# Altium PCB pmu.PcbDoc
Units mil, origin at the board's own origin, x right, y up, seen from the top; angles counter-clockwise.
Board outline 1870 x 900 mil, 2 copper layers (Top Layer, Bottom Layer); 22 components, 13 nets, 54 pads, 17 vias.
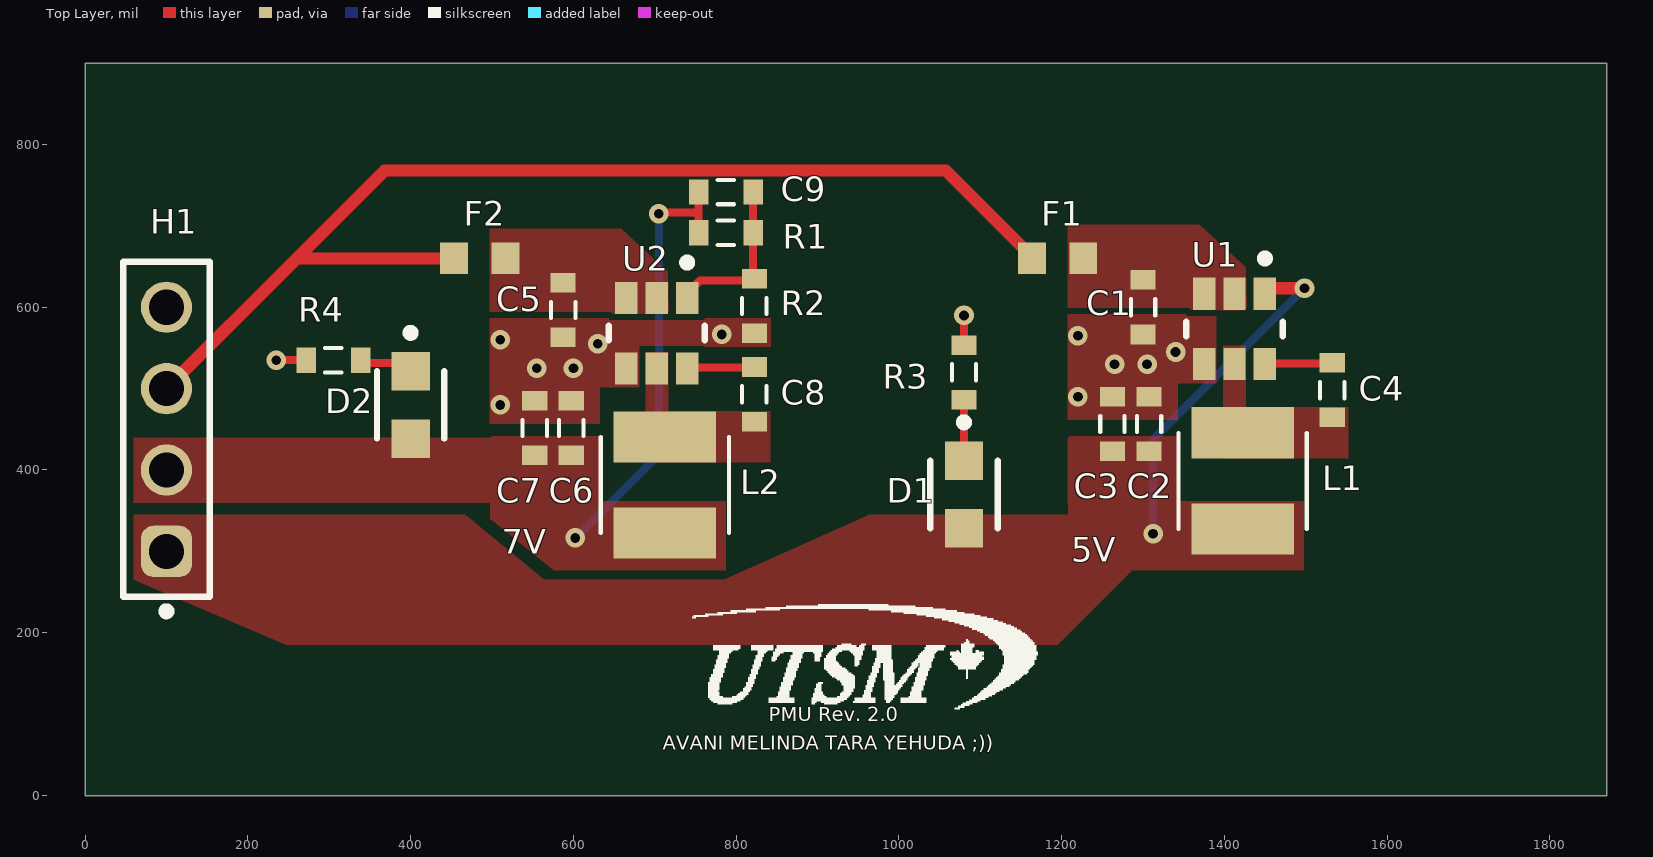
[diagram p0: Top Layer view]
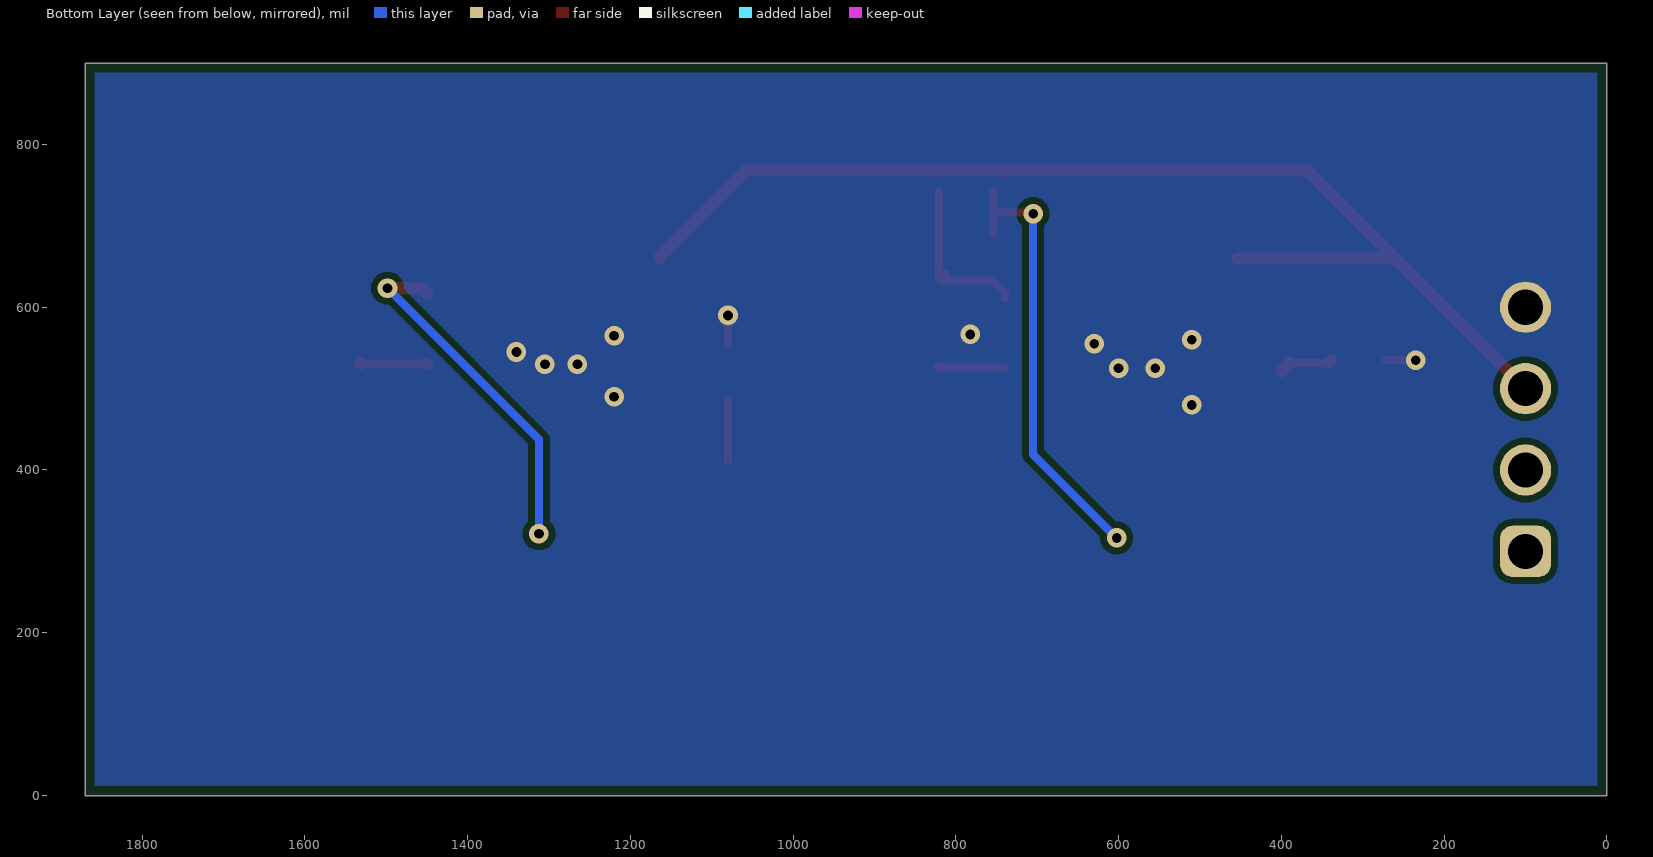
[diagram p1: Bottom Layer view, seen from below]
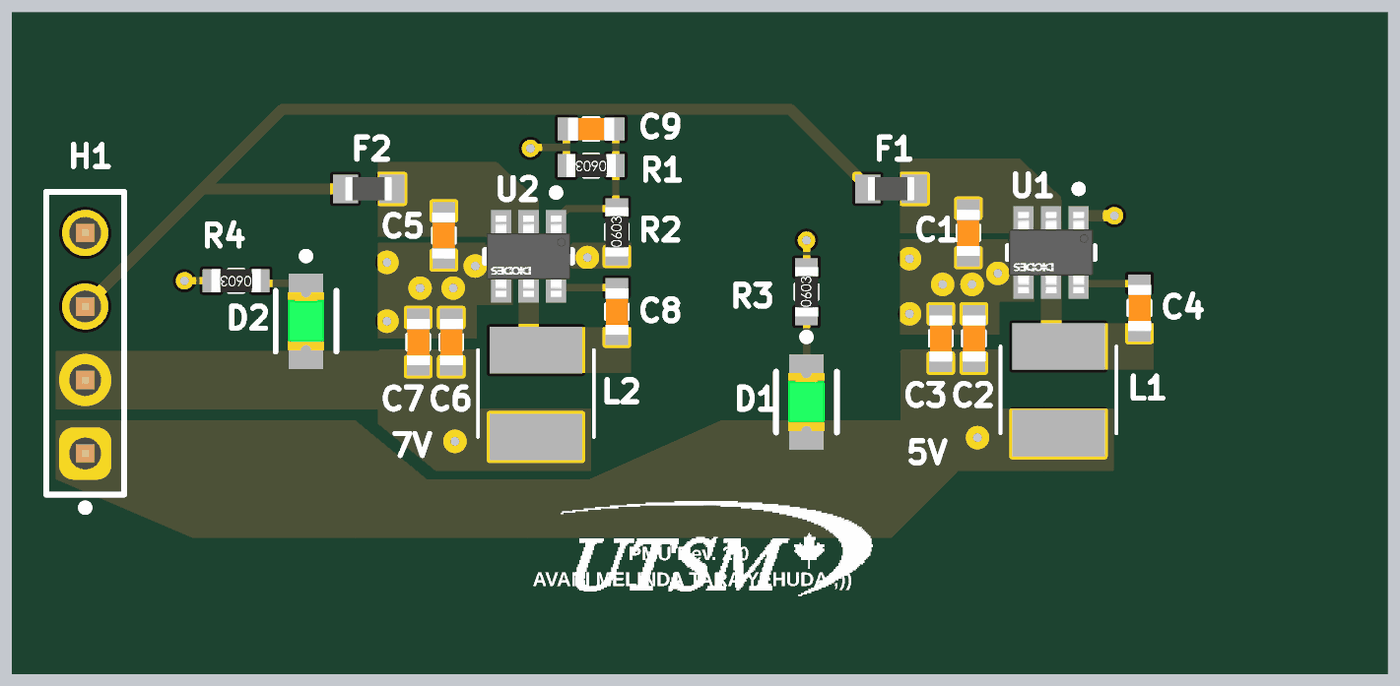
[diagram p2: 3D render of the assembled board from above, using the file's embedded part models]

## Layer stack, top to bottom
Top Solder: solder mask 0.4, Solder Resist, Dk 3.5
Top Layer: signal copper 1.4
Dielectric 1: dielectric 12.6, FR-4, Dk 4.8
Bottom Layer: signal copper 1.4
Bottom Solder: solder mask 0.4, Solder Resist, Dk 3.5

## Board outline
0,0 1870,0 1870,900 0,900

## Design rules (kind name [scope] priority, off if disabled: settings)
BoardOutlineClearance [All] p1: gap=11.81 ignorepadtopadclearanceinfootprint=FALSE except(15.75: Arc-SplitBarrior Arc-SplitContinuation Track-SplitBarrior Track-SplitContinuation SMDPad-SplitBarrior SMDPad-SplitContinuation THPad-SplitBarrior THPad-SplitContinuation Via-SplitBarrior Via-SplitContinuation Fill-SplitBarrior Fill-SplitContinuation Poly-SplitBarrior Poly-SplitContinuation Region-SplitBarrior Region-SplitContinuation Text-SplitBarrior Text-SplitContinuation)
Clearance "Clearance Different Nets" [All] p1: gap=7.87 ignorepadtopadclearanceinfootprint=FALSE except(3.5: Arc-Arc Arc-Track Arc-SMDPad Track-Track Track-SMDPad; 5: SMDPad-SMDPad SMDPad-Via THPad-Via Via-Via; 10: Arc-Via Arc-Text Track-Via Track-Text SMDPad-Text THPad-Text Via-Text Fill-Text Poly-Text Region-Text Text-Text; 19.68: THPad-THPad Via-Hole)
Clearance "Clearance Same Nets" [All] p2: gap=7.87 ignorepadtopadclearanceinfootprint=FALSE except(3.5: Arc-Arc Arc-Track Arc-SMDPad Track-Track Track-SMDPad SMDPad-SMDPad; 5: SMDPad-Via THPad-Via; 10: Arc-Via Arc-Text Track-Via Track-Text SMDPad-Text THPad-Text Via-Via Via-Text Fill-Text Poly-Text Region-Text Text-Text)
Clearance "Clearance Bottom Layer" [OnLayer('Bottom Layer')] p3: gap=8 ignorepadtopadclearanceinfootprint=TRUE except(10: Arc-Text Track-Text SMDPad-Text THPad-Text Via-Text Fill-Text Poly-Text Region-Text Text-Text)
Clearance "Clearance Top Layer" [OnLayer('Top Layer')] p4: gap=8 ignorepadtopadclearanceinfootprint=TRUE except(10: Arc-Text Track-Text SMDPad-Text THPad-Text Via-Text Fill-Text Poly-Text Region-Text Text-Text)
HoleSize [All] p1: absolutevalues=TRUE maxlimit=248.03 minlimit=7.87 maxpercent=80.000 minpercent=20.000
MinimumAnnularRing [All] p1: minimumring=5.12
MinimumSolderMaskSliver [All] p1: minsoldermaskwidth=3.94
PolygonConnect PolygonConnect_1 [All] p1: connectstyle=Direct reliefconductorwidth=20 reliefentries=4 polygonreliefangle="90 Angle" airgapwidth=10
RoutingCorners [All] p1: cornerstyle=Round minsetback=100 maxsetback=100
RoutingVias [All] p1: holewidth=19.68 width=39.37 viastyle="Through Hole" minholewidth=7.87 minwidth=13.78 maxholewidth=39.37 maxwidth=78.74
SilkToSilkClearance [All] p1: silktosilkclearance=3.94
SilkToSolderMaskClearance [IsPad] p1: minsilkscreentomaskgap=3.94 clearancetoexposedcopper=TRUE
SolderMaskExpansion [All] p1: expansion=4 istentingtop=FALSE
SupplyNets "Schematic Supply Nets_3" [InNet('+5')] p1: voltage=0.000
SupplyNets "Schematic Supply Nets_2" [InNet('Vin')] p2: voltage=0.000
SupplyNets "Schematic Supply Nets_1" [InNet('+7')] p3: voltage=0.000
SupplyNets "Schematic Supply Nets" [InNet('GND')] p4: voltage=0.000
Width [All] p1: maxlimit=100 minlimit=3.5 preferedwidth=15
25 further rules are at their usual default settings.

## Components (designator, comment, footprint, x,y, rotation, side; value= is the part's Value field where it differs from the comment)
C1 "Cap" 0603c 1300,600 r90 top value=10uF
C2 "Cap" 0603c 1307.4,456.57 r270 top value=22uF
C3 "Cap" 0603c 1262.4,456.57 r270 top value=22uF
C4 "Cap" 0603c 1532.4,498.07 r270 top value=100nF
C5 "Cap" 0603c 587.4,596.57 r90 top value=10uF
C6 "Cap" 0603c 597.4,451.57 r270 top value=22uF
C7 "Cap" 0603c 552.4,451.57 r270 top value=22uF
C8 "Cap" 0603c 822.4,493.07 r270 top value=100nF
C9 "Cap" 0603c 787.4,741.57 r180 top value=100pF
D1 "LTST-C171GKT" FP-LTST-C171GKT-MFG 1080,370 r270 top
D2 "LTST-C171GKT" FP-LTST-C171GKT-MFG 400,480 r270 top
F1 "FMC16751WBTP" FUSC1608X64N 1195,660 r0 top
F2 "FMC16751WBTP" FUSC1608X64N 485,660 r0 top
H1 "61300411121" 61300411121 100,450 r90 top
L1 "3.3uH" 1210 1422.4,386.57 r270 top
L2 "3.3uH" 1210 712.4,381.57 r270 top
R1 "Res3" 0603r 787.4,691.57 r180 top value=200k
R2 "Res3" 0603r 822.4,601.57 r90 top value=25k
R3 "" 0603r 1080,520 r90 top value=300
R4 "" 0603r 305,535 r180 top value=300
U1 "AP63205WU-7" FP-TSOT26-MFG 1412.4,573.29 r270 top
U2 "AP63200WU-7" FP-TSOT26-MFG 702.4,568.29 r270 top

## Footprints (in the part's own frame and the unit in brackets; to place one, negate y for a bottom-side part, rotate by r counter-clockwise, add the part's x,y. Pads: shape width x height; smd on the part's side, far side on the other; paste and mask are expansions set on the pad)
0603c [mil]
  rect 24x31 smd: 1(-33.5,0) 2(33.5,0)
  silkscreen extent -10,-15 10,15, body extent -31,-15 31,16, height 31
0603r [mil]
  rect 24x31 smd: 1(-33.5,0) 2(33.5,0)
  silkscreen extent -10,-15 10,15, body extent -33,-16 33,16, height 22
1210 [mm]
  rect 1.6x3.2 smd: P$1(-1.5,0) P$2(1.5,0)
  silkscreen extent -1.5,-2 1.5,2
61300411121 [mm] "Pin Header, pitch 2.54 mm, THT, Vertical, single row, 4p"
  rrect50% 1.6x1.6 hole 1.1: 1(-3.81,0)
  round 1.6 hole 1.1: 2(-1.27,0) 3(1.27,0) 4(3.81,0)
  silkscreen extent -5.8,-1.35 5.23,1.35, body extent -5.08,-1.27 5.08,1.27, height 8.57
FP-LTST-C171GKT-MFG [mm]
  rect 1.2x1.2 smd paste+0 mask+0: 1(-1.05,0) 2(1.05,0)
  silkscreen extent -2.37,-1.05 1.05,1.05, body extent -1.75,-0.77 1.75,0.77, height 0.25
FP-TSOT26-MFG [mm]
  rect 1x0.7 smd paste+0 mask+0: 1(-1.099,0.95) 2(-1.099,0) 3(-1.099,-0.95) 4(1.099,-0.95) 5(1.099,0) 6(1.099,0.95)
  silkscreen extent -2.32,-1.5 0.22,1.5, body extent -1.7,-1.6 1.7,1.6, height 0.25
FUSC1608X64N [mm]
  rect 0.87x0.98 smd: 1(-0.8,0) 2(0.8,0)
  body extent -0.8,-0.4 0.8,0.4, height 0.64

## Part data
C1 C5: "SMD Capacitor / CL21A106KOQNNNG", LatestRevisionDate=17-Jul-2002, LatestRevisionNote="Re-released for DXP Platform.", PackageDescription="Radial Cap, Thru-Hole; 2 Leads; 0.3 in Pin Spacing", PackageReference=RAD-0.3, Published=8-Jun-2000, Publisher="Altium Limited"
C2 C3 C4 C6 C7 C8 C9: "SMD Capacitor", LatestRevisionDate=17-Jul-2002, LatestRevisionNote="Re-released for DXP Platform.", PackageDescription="Radial Cap, Thru-Hole; 2 Leads; 0.3 in Pin Spacing", PackageReference=RAD-0.3, Published=8-Jun-2000, Publisher="Altium Limited"
D1 D2: library part CMP-22017-000007-1, "LED GREEN CLEAR CHIP SMD", Case Code (Imperial)=0805, Case Code (Metric)=2012, Color=Green, Forward Current=30mA, Forward Voltage=2.1V, Lens Color=Colorless, Max Operating Temperature=85°C, Min Operating Temperature=-55°C, Package Quantity=1, Power Dissipation=100mW, Reverse Voltage=5V, Test Current=10mA, Case/Package=0805, Depth=1.25mm, Dominant Wavelength=569nm, Height=0.8mm, Illumination Color=Green, Lead Free="Lead Free", Length=2mm, Lens Style=Diffused, Lens Transparency=Clear, Luminous Intensity=12mcd, Mount="Surface Mount", Number of Elements=1, Number of LEDs=1, Number of Pins=2, Packaging="Tape and Reel", Power Rating=100mW, Radiation Hardening=No, Viewing Angle=130°, Wavelength=585nm, Width=1.25mm
F1 F2: library part ERB-RE1R00V, "0.8A - FMC16801WHTP / 0.75A - FMC16751WBTP", Package="0603 Panasonic Electronic Components", Availability="In Stock", Check_prices=https://www.snapeda.com/parts/ERB-RE1R00V/Panasonic/view-part/?ref=eda, MF=Panasonic, MP=ERB-RE1R00V, Price=None, Purchase-URL=https://pricing.snapeda.com/search/part/ERB-RE1R00V/?ref=eda, SnapEDA_Link=https://www.snapeda.com/parts/ERB-RE1R00V/Panasonic/view-part/?ref=snap
H1: "WR-PHD Pin Header, THT, Vertical, pitch 2.54mm, 1 Row, 4P", Contact Resistance=20mOhm, Manufacturer="Wurth Elektronik", Operating Temperature Max=105°C, Operating Temperature Min=-40°C, Rated Current=3A, Withstanding Voltage=500V, Working Voltage=250V, Category="Board-to-Board Connectors", ComponentLink1Description="Website Link", ComponentLink1URL=https://www.we-online.com/redexpert/article/61300411121?ad, ComponentLink2Description="Datasheet Link", ComponentLink2URL=https://www.we-online.com/redexpert/spec/61300411121?ad, Gender="Pin Header", Manufacturer Part Number=61300411121, Match Code=WR-PHD, Mount="Through Hole", Number of Pins=4, Number of Rows=1, Orientation=Vertical, Packaging=Bag, Pitch=2.54mm
L1 L2: library part Ind, "SMD Inductor / SRP3212-3R3M", Package=None, Availability="In Stock", Check_prices=https://www.snapeda.com/parts/SRP3212-4R7M/Bourns/view-part/?ref=eda, MF=Bourns, MP=SRP3212-4R7M, Price=None, Purchase-URL=https://pricing.snapeda.com/search/part/SRP3212-4R7M/?ref=eda, SnapEDA_Link=https://www.snapeda.com/parts/SRP3212-4R7M/Bourns/view-part/?ref=snap
R1 R2: "SMD Resistor", LatestRevisionDate=29-May-2009, LatestRevisionNote="IPC-7351 Footprint Added.", PackageDescription="Chip Resistor", PackageReference=J1-0603, Published=8-Jun-2000, Publisher="Altium Limited"
R3 R4: library part Res3, "SMD Resistor", LatestRevisionDate=29-May-2009, LatestRevisionNote="IPC-7351 Footprint Added.", PackageDescription="Chip Resistor", PackageReference=J1-0603, Published=8-Jun-2000, Publisher="Altium Limited"
U1: library part CMP-12757-000001-1, "IC REG BUCK 5V 2A TSOT26", Ambient Temperature Range High=+85°C, Ambient Temperature Range Low=-40°C, Manufacturer="Diodes Inc.", Max Junction Temp=+160°C, Max Supply Voltage=32V, Min Supply Voltage=3.8V, Nominal Supply Current=22uA, Output Current=2A, Output Voltage=5V, Package=TSOT26, Switching Frequency=1100kHz, Temperature="-40°C to +85°C", Automotive=No, Category=IC, ComponentLink2Description=Datasheet, ComponentLink2URL=https://www.diodes.com/assets/Datasheets/AP63200-AP63201-AP63203-AP63205.pdf, Device Class L1="Integrated Circuits (ICs)", Device Class L2="Power Management ICs", Device Class L3="Voltage Regulators - Switching", Digikey Description="IC REG BUCK 5V 2A TSOT26", Footprint Url=https://www.diodes.com/assets/Package-Files/TSOT26.pdf, Height=1mm, Lead Free=Yes, Manufacturer Part Number=AP63205WU-7, Max Duty Cycle=100%, Number Of Outputs=1, Octopart=https://octopart.com/ap63205wu-7-diodes+inc.-98099551, Output Type=Fixed, RoHS=TRUE, Standoff Height=0.01mm, Switching Topology=Buck, Temperature Range High=+85°C, Temperature Range Low=-40°C
U2: library part CMP-12757-000010-1, "IC REG BUCK ADJUSTABLE 2A TSOT26", Ambient Temperature Range High=+85°C, Ambient Temperature Range Low=-40°C, Manufacturer="Diodes Inc.", Max Junction Temp=+160°C, Max Supply Voltage=32V, Min Supply Voltage=3.8V, Nominal Supply Current=22uA, Output Current=2A, Package=TSOT26, Switching Frequency=500kHz, Temperature="-40°C to +85°C", Automotive=No, Category=IC, ComponentLink2Description=Datasheet, ComponentLink2URL=https://www.diodes.com/assets/Datasheets/AP63200-AP63201-AP63203-AP63205.pdf, Device Class L1="Integrated Circuits (ICs)", Device Class L2="Power Management ICs", Device Class L3="Voltage Regulators - Switching", Digikey Description="IC REG BUCK ADJUSTABLE 2A TSOT26", Footprint Url=https://www.diodes.com/assets/Package-Files/TSOT26.pdf, Height=1mm, Ipc Land Pattern Name=SOT95P280X100-6, Lead Free=Yes, Manufacturer Part Number=AP63200WU-7, Mouser Description="AP63200 Series 1.2 V 2 A Adjustable Synchronous Buck Converter - TSOT-26", Number Of Outputs=1, Octopart=https://octopart.com/ap63200wu-7-diodes+inc.-98099548, Output Type=AdjustableProgrammable, RoHS=TRUE, Standoff Height=0.01mm, Switching Topology=Buck, Temperature Range High=+85°C, Temperature Range Low=-40°C

## Via types
v1: diameter 24, hole 12, Top Layer to Bottom Layer, 17 vias

## Nets (pads, with @x,y where several pads share a name; then routed paths per layer and width w, separated by ;. In a path a pad name is that pad's centre, name@x,y a point inside that pad or via, vN(x,y) a via of type N, cw(c..) or ccw(c..) an arc to the next point about the centre after c; other vN are vias at no path point)
+5: C2.2 C3.2 D1.2 H1.1 L1.P$2 U1.1 | length 430.7
  Top Layer w15: U1.1 1449.8,617.15 1456.08,623.43 v1(1498.43,623.43)
  Bottom Layer w10: v1(1312.4,321.57) 1312.4,437.4 v1(1498.43,623.43)
+7: C6.2 C7.2 C9.2 D2.2 H1.2 L2.P$2 R1.2 | length 540.5
  Top Layer w10: v1(705,715) 706.57,716.57 753.9,716.57 ; R1.2 753.9,716.57 ; C9.2 753.9,716.57
  Bottom Layer w10: v1(602.4,316.57) 705,419.17 v1(705,715)
FB: C9.1 R1.1 R2.2 U2.1 | length 203.5
  Top Layer w10: U2.1 739.8,617.48 755.4,633.07 814.4,633.07 814.4,639.57 R2.2@811.9,642.07 ; R2.2@820.9,635.07 R1.1 C9.1
GND: C1.1 C2.1 C3.1 C5.1 C6.1 C7.1 H1.4 R2.1 R3.2 R4.2 U1.4 U2.4 | length 73
  Top Layer w10: v1(235,535) R4.2 ; R3.2 v1(1080,590)
  other v1: 510,480 1220,490 555,525 600,525 1265,530 1305,530 1340,545 630,555 510,560 1220,565 782.4,566.57
NetC1_2: C1.2 F1.2 U1.2 U1.3
NetC4_1: C4.1 U1.6 | length 83.3
  Top Layer w10: U1.6@1450.59,530.79 C4.1@1531.61,530.79
  Top Layer w15: U1.6 U1.6@1450.59,530.79 ; C4.1@1531.61,530.79 C4.1
NetC5_2: C5.2 F2.2 U2.2 U2.3
NetC8_1: C8.1 U2.6 | length 83.3
  Top Layer w10: U2.6 740.59,525.79 821.61,525.79 C8.1
NetD1_1: D1.1 R3.1 | length 75.2
  Top Layer w10: D1.1 R3.1
NetD2_1: D2.1 R4.1 | length 67.2
  Top Layer w10: R4.1@342,531.5 D2.1@389.84,531.5
  Top Layer w15: R4.1 R4.1@342,531.5 ; D2.1@389.84,531.5 D2.1
SW1: C4.2 L1.P$1 U1.5
SW2: C8.2 L2.P$1 U2.5
Vin: F1.1 F2.1 H1.3 | length 1414.1
  Top Layer w15: H1.3 260,660 ; F2.1 260,660 ; F1.1 1163.5,662.17 1057.59,768.07 368.07,768.07 260,660

## Polygon pours and split planes (outlines as drawn)
GND on Bottom Layer "GND_L02_P001" (solid, pour order 1): 0,900 0,0 1870,0 1870,900 1448.99,900 1440,900
+5 on Top Layer "+5_L01_P020" (solid, pour order 20): 60,345 467.16,345 564.26,265.02 785,265.02 963.47,345 1285,345 1285,275 1195,185 246.63,185 60,265.02
+5 on Top Layer "+5_L01_P016" (solid, pour order 16): 1342.4,441.57 1207.4,441.57 1208.2,276.57 1497.4,276.57 1497.4,361.57 1342.4,361.57
+7 on Top Layer "+7_L01_P017" (solid, pour order 17): 60,440 60.21,439.79 502.67,439.79 502.67,357.16 502.28,356.78 499.06,360 60,360
GND on Top Layer "GND_L01_P012" (solid, pour order 12): 1390.05,591.57 1207.4,591.57 1207.4,461.57 1212.4,461.57 1342.4,461.57 1342.4,506.57 1390.05,506.57
GND on Top Layer "GND_L01_P003" (solid, pour order 3): 842.4,586.57 702.4,586.57 497.4,586.57 497.4,456.57 502.4,456.57 632.4,456.57 632.4,501.57 682.4,501.57 682.4,551.57 842.4,551.57
SW2 on Top Layer "SW2_L01_P005" (solid, pour order 5): 716.41,547.6 688.77,547.6 688.77,411.28 686.77,409.28 841.87,409.28 841.87,471.95 716.41,471.95
+7 on Top Layer "+7_L01_P006" (solid, pour order 6): 632.4,441.57 497.4,441.57 497.89,340.33 575.89,276.57 787.4,276.57 787.4,361.57 632.4,361.57
NetC5_2 on Top Layer "NETC5_2_L01_P007" (solid, pour order 7): 716.18,643.91 717.4,591.57 497.4,591.57 497.4,696.57 658.88,696.57
SW1 on Top Layer "SW1_L01_P015" (solid, pour order 15): 1426.41,552.6 1398.77,552.6 1398.77,416.28 1396.77,414.28 1551.87,414.28 1551.87,476.95 1426.41,476.95
NetC1_2 on Top Layer "NETC1_2_L01_P014" (solid, pour order 14): 1426.18,648.91 1427.4,596.57 1207.4,596.57 1207.4,701.57 1368.88,701.57

## Silkscreen, mask and mechanical layers (free items; w line width, h text height)
Top Overlay:
  drawing of 6 lines, arcs and shapes, not listed
  text "7V" at 512,297 h30
  text "5V" at 1212,287 h30
  text "PMU Rev. 2.0" at 840,85 h30
  text "AVANI MELINDA TARA YEHUDA ;))" at 710,50 h30